# EAGLE board morse_lora_v4 (EAGLE 9.6.2)
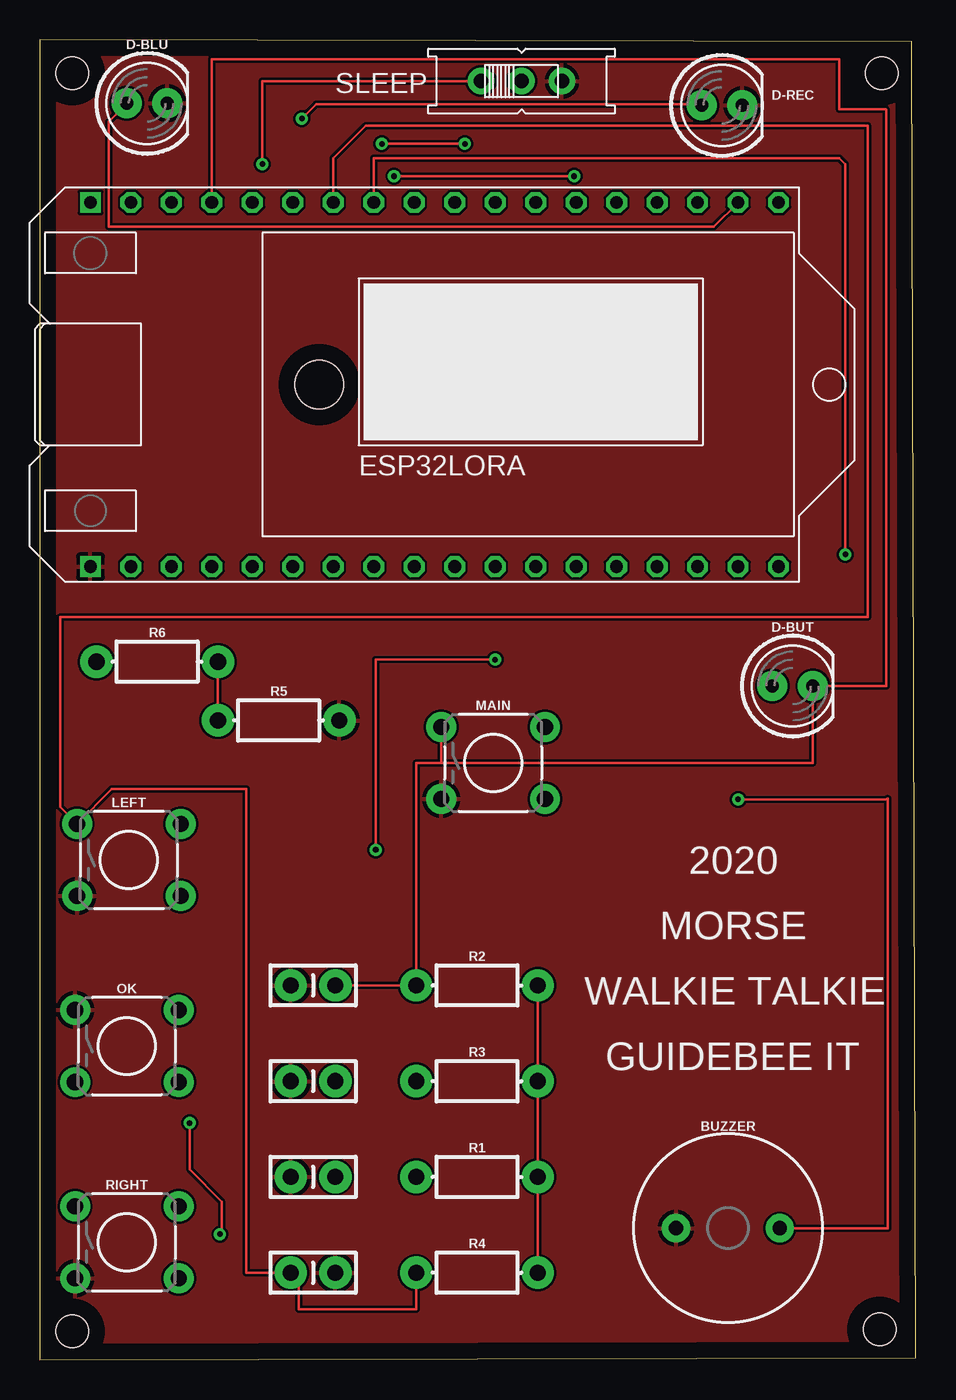
[diagram p0: board, top side]
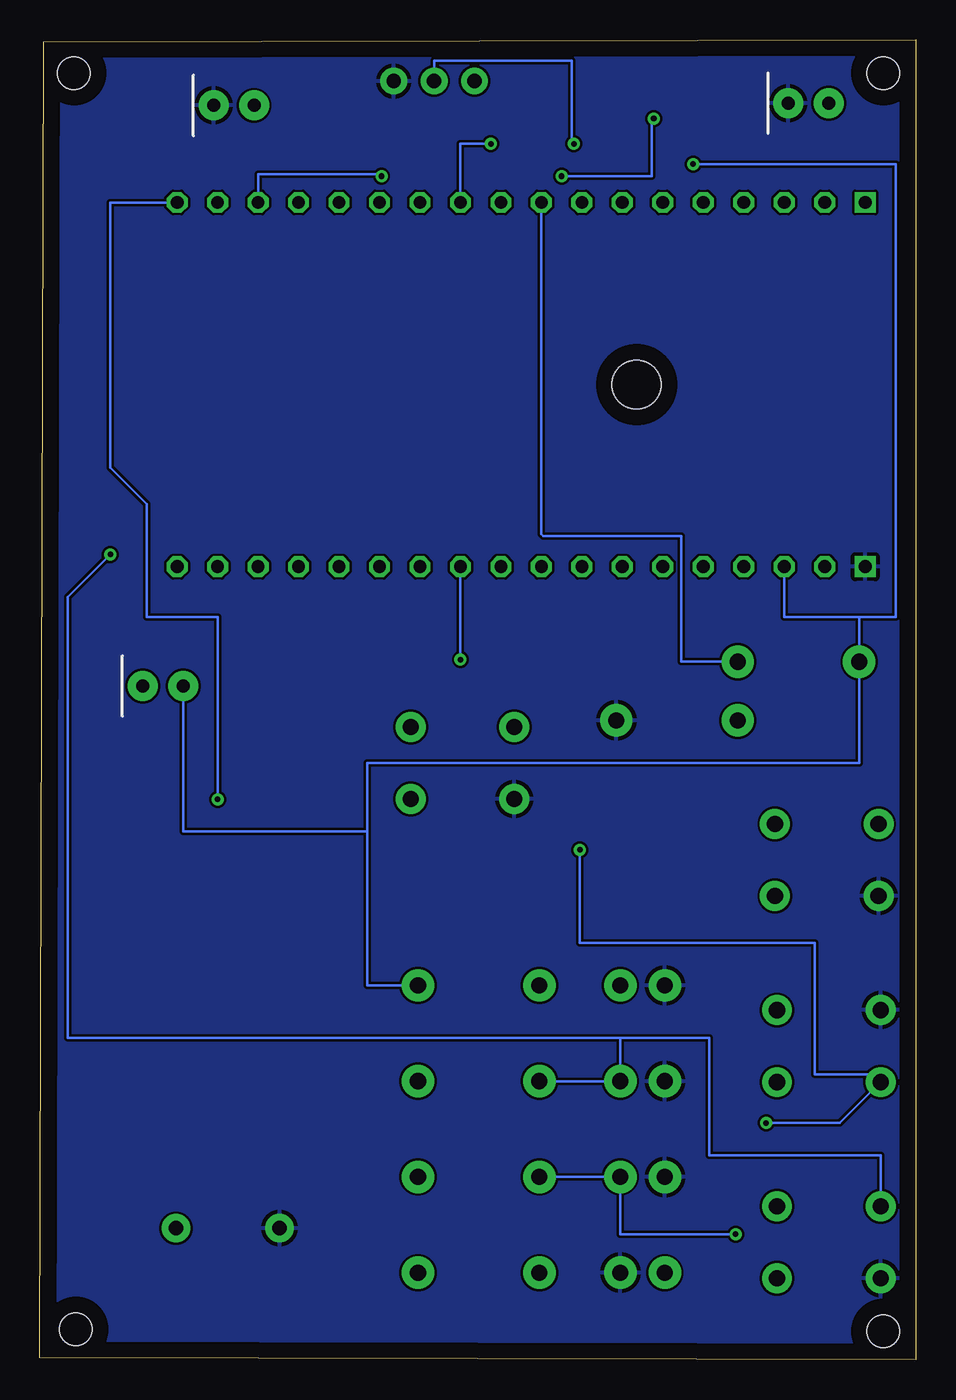
[diagram p1: board, bottom side, seen from below]

Size 54.97 x 82.86 mm. Coordinates in mm from the lower left corner, seen from the top.
Outline: 0,0 54.97,0.13 54.72,82.73 0,82.86 0,0
Copper layers (1*16): Top 0.035mm / dielectric 1.5mm / Bottom 0.035mm
Design rules "default": minimum track width 6mil, minimum drill 0.35mm, track to track 6mil, track to pad 6mil, pad to pad 6mil, via to via 6mil, smd to smd 6mil, copper to edge 40mil, drill to drill 6mil, minimum pad ring 10mil, minimum via ring 8mil, stop-mask expansion 4mil, vias tented up to drill 0mil, thermal gap 10mil
Holes 2.03 mm at 2.03,80.77 52.83,80.77 52.7,1.9 2.03,1.78
Holes 3.05 mm at 17.53,61.21

## Footprints (pad centres in the part's own frame; a part is rotated, then mirrored left to right if it is on the bottom)
BUZZER-12MM = drill 0.9 pad 1.778: + 3.25,0; - -3.25,0
CAP-PTH-SMALL-KIT = drill 1.016 pad 2.032: 1 -1.397,0; 2 1.397,0
LED_5MM = drill 0.813 pad 1.88: A -1.27,0; K 1.27,0
2.54MM_2X18 = drill 0.8 square: P$1 -20.32,-11.43; P$36 -20.32,11.43 | drill 0.8 octagon: P$2 -17.78,-11.43; P$3 -15.24,-11.43; P$4 -12.7,-11.43; P$5 -10.16,-11.43; P$6 -7.62,-11.43; P$7 -5.08,-11.43; P$8 -2.54,-11.43; P$9 0,-11.43; P$10 2.54,-11.43; P$11 5.08,-11.43; P$12 7.62,-11.43; P$13 10.16,-11.43; P$14 12.7,-11.43; P$15 15.24,-11.43; P$16 17.78,-11.43; P$17 20.32,-11.43; P$18 22.86,-11.43; P$19 22.86,11.43; P$20 20.32,11.43; P$21 17.78,11.43; P$22 15.24,11.43; P$23 12.7,11.43; P$24 10.16,11.43; P$25 7.62,11.43; P$26 5.08,11.43; P$27 2.54,11.43; P$28 0,11.43; P$29 -2.54,11.43; P$30 -5.08,11.43; P$31 -7.62,11.43; P$32 -10.16,11.43; P$33 -12.7,11.43; P$34 -15.24,11.43; P$35 -17.78,11.43
TACTILE_SWITCH_PTH_6.0MM = drill 1.016 pad 1.88: 1 -3.251,2.261; 2 3.251,2.261; 3 -3.251,-2.261; 4 3.251,-2.261
AXIAL-0.3-KIT = drill 1.016 pad 2.032: P$1 -3.81,0; P$2 3.81,0
EG1218 = drill 0.9 pad 1.676: O -2.54,0; P 0,0; S 2.54,0

## Placement (x,y rotation side)
BUZZER  BUZZER-PTH  [BUZZER-12MM]  43.18,8.25 0 top
C1  0.1uF  [CAP-PTH-SMALL-KIT]  17.15,23.49 0 top
C2  0.1uF  [CAP-PTH-SMALL-KIT]  17.15,17.48 0 top
C3  0.1uF  [CAP-PTH-SMALL-KIT]  17.15,5.46 0 top
C4  0.1uF  [CAP-PTH-SMALL-KIT]  17.15,11.47 0 top
D-BLU  [LED_5MM]  6.73,78.87 0 top
D-BUT  [LED_5MM]  47.24,42.29 0 top
D-REC  [LED_5MM]  42.8,78.74 0 top
ESP32LORA  WIFI-LORA-32  [2.54MM_2X18]  23.5,61.21 0 top
LEFT  MOMENTARY-SWITCH-SPST-PTH-6.0MM  [TACTILE_SWITCH_PTH_6.0MM]  5.59,31.37 0 top
MAIN  MOMENTARY-SWITCH-SPST-PTH-6.0MM  [TACTILE_SWITCH_PTH_6.0MM]  28.45,37.46 0 top
OK  MOMENTARY-SWITCH-SPST-PTH-6.0MM  [TACTILE_SWITCH_PTH_6.0MM]  5.46,19.68 0 top
R1  10k  [AXIAL-0.3-KIT]  27.43,11.47 0 top
R2  10k  [AXIAL-0.3-KIT]  27.43,23.49 0 top
R3  10k  [AXIAL-0.3-KIT]  27.43,17.48 0 top
R4  10k  [AXIAL-0.3-KIT]  27.43,5.46 0 top
R5  10k  [AXIAL-0.3-KIT]  14.99,40.13 0 top
R6  10k  [AXIAL-0.3-KIT]  7.37,43.81 0 top
RIGHT  MOMENTARY-SWITCH-SPST-PTH-6.0MM  [TACTILE_SWITCH_PTH_6.0MM]  5.46,7.37 0 top
SLEEP  [EG1218]  30.23,80.26 0 top

## Library data of the parts
BUZZER = SparkFun-Electromechanical; PROD_ID: COMP-08253; SF_SKU: COM-07950
C1-C4 = SparkFun-Capacitors; PROD_ID: CAP-08370
D-BLU D-BUT D-REC = SparkFun-LED
ESP32LORA = ESP32_modules
LEFT MAIN OK RIGHT = SparkFun-Switches; PROD_ID: SWCH-08441; SF_SKU: COM-00097
R1-R6 = SparkFun-Resistors; PROD_ID: RES-12183
SLEEP = adafruit

## Nets
3V3: D-BUT.A ESP32LORA.P$3 R1.P$2 R2.P$2 R3.P$2 R4.P$2 R6.P$1 SLEEP.O
23: C4.2 ESP32LORA.P$11 OK.3 R1.P$1
34: C2.2 ESP32LORA.P$29 R3.P$1 RIGHT.1
35: ESP32LORA.P$28 R5.P$1 R6.P$2
36: C1.2 D-BUT.K ESP32LORA.P$33 MAIN.1 R2.P$1
39: C3.1 ESP32LORA.P$30 LEFT.1 R4.P$1
GND: BUZZER.- C1.1 C2.1 C3.2 C4.1 D-BLU.K D-REC.K ESP32LORA.P$1 LEFT.3 MAIN.3 OK.1 R5.P$2 RIGHT.3 SLEEP.S
N$4: BUZZER.+ ESP32LORA.P$19
N$5: D-REC.A ESP32LORA.P$21
N$6: D-BLU.A ESP32LORA.P$20
N$13: ESP32LORA.P$26 SLEEP.P

## Tracks (layer width: path | path; a pad name or v marks a point on that pad's centre or on a via)
3V3  (via drill 0.35)
  Top 0.152: SLEEP.O 13.97,80.26 v13.97,75.06 | R2.P$2 R3.P$2 R1.P$2 R4.P$2
  Bottom 0.152: v13.97,75.06 1.27,75.06 1.27,46.61 3.56,46.61 | 3.56,46.61 8.26,46.61 ESP32LORA.P$3 | 34.42,33.15 34.42,37.46 3.56,37.46 R6.P$1 3.56,46.61 | R2.P$2 34.42,23.49 34.42,33.15 | D-BUT.A 45.97,33.15 34.42,33.15
23  (via drill 0.35)
  Top 0.152: v28.58,43.94 21.08,43.94 v21.08,32 | v9.4,14.86 9.4,11.94 11.43,9.91 11.43,8 v11.3,7.87
  Bottom 0.152: ESP32LORA.P$11 v28.58,43.94 | v21.08,32 21.08,26.16 6.35,26.16 6.35,17.91 2.69,17.91 OK.3 4.77,14.86 v9.4,14.86 | v11.3,7.87 18.54,7.87 C4.2 R1.P$1
34  (via drill 0.35)
  Top 0.152: ESP32LORA.P$29 20.96,75.44 50.16,75.44 50.55,75.06 v50.55,50.55
  Bottom 0.152: v50.55,50.55 53.21,47.88 53.21,20.19 18.54,20.19 | 18.54,20.19 C2.2 R3.P$1 | 18.54,20.19 12.95,20.19 12.95,12.83 2.21,12.83 RIGHT.1
35
  Top 0.152: R6.P$2 R5.P$1
  Bottom 0.152: ESP32LORA.P$28 23.5,51.82 23.37,51.69 14.73,51.69 14.73,43.81 R6.P$2
36
  Top 0.152: 25.15,37.46 48.51,37.46 D-BUT.K 53.12,42.29 53.12,78.45 53.09,78.49 50.16,78.49 50.16,81.64 10.79,81.64 ESP32LORA.P$33 | 25.15,37.46 23.62,37.46 R2.P$1 C1.2 | MAIN.1 25.2,38.1 25.2,37.52 25.15,37.46
39
  Top 0.152: ESP32LORA.P$30 18.42,75.44 20.45,77.47 51.94,77.47 51.94,46.61 1.27,46.61 1.27,34.7 LEFT.1 4.52,35.81 12.95,35.81 12.95,5.46 C3.1 16.26,4.95 16.26,3.17 23.62,3.17 R4.P$1
GND
  pour Top: 54.48,-0.25 54.48,82.55 0.38,82.55 0.38,0.38 53.85,0.38
  pour Bottom: 54.36,0.38 0.38,0.38 0.38,82.55 54.36,82.55
N$4  (via drill 0.35)
  Top 0.152: v43.81,35.18 53.06,35.18 53.21,35.22 53.21,8.25 BUZZER.+
  Bottom 0.152: ESP32LORA.P$19 50.55,72.64 50.55,56.01 48.26,53.72 48.26,46.61 43.81,46.61 v43.81,35.18
N$5  (via drill 0.35)
  Top 0.152: v33.53,74.3 v22.23,74.3 | v16.45,77.91 17.34,78.8 41.47,78.8 D-REC.A
  Bottom 0.152: ESP32LORA.P$21 41.27,74.42 33.66,74.42 v33.53,74.3 | v22.23,74.3 16.57,74.3 16.57,77.79 v16.45,77.91
N$6
  Top 0.152: ESP32LORA.P$20 42.29,71.12 4.32,71.12 4.32,77.72 D-BLU.A
N$13  (via drill 0.35)
  Top 0.152: v26.67,76.33 v21.46,76.33
  Bottom 0.152: ESP32LORA.P$26 28.58,76.33 v26.67,76.33 | v21.46,76.33 21.59,76.45 21.59,81.53 30.23,81.53 SLEEP.P

## Text on the board
tNames: 2020 | MORSE | WALKIE TALKIE | GUIDEBEE IT